# EAGLE board eagle (EAGLE 7.5.0)
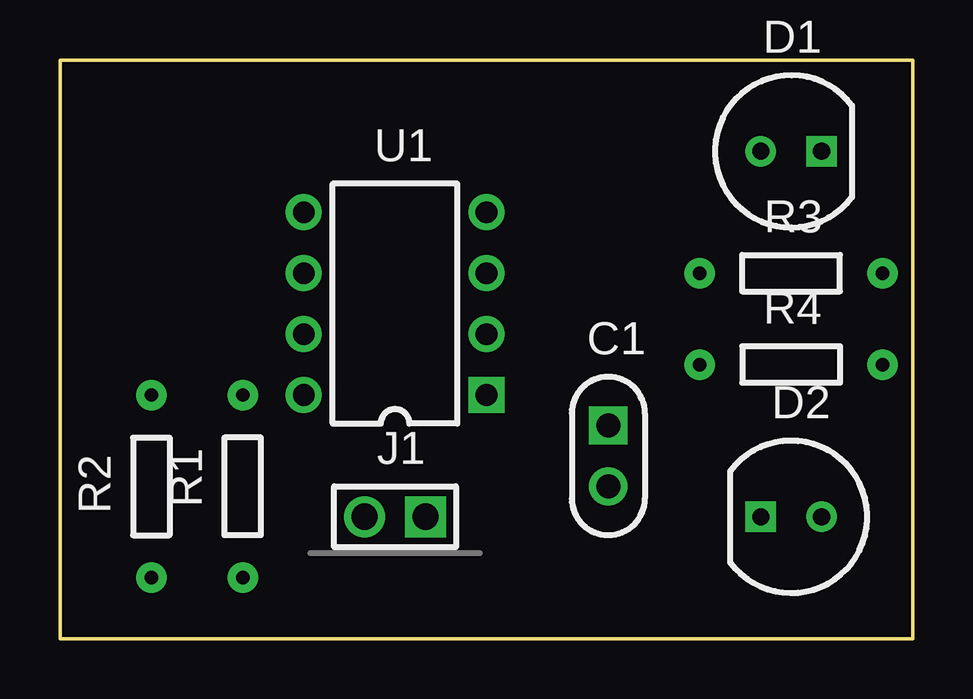
[diagram p0: board, top side]
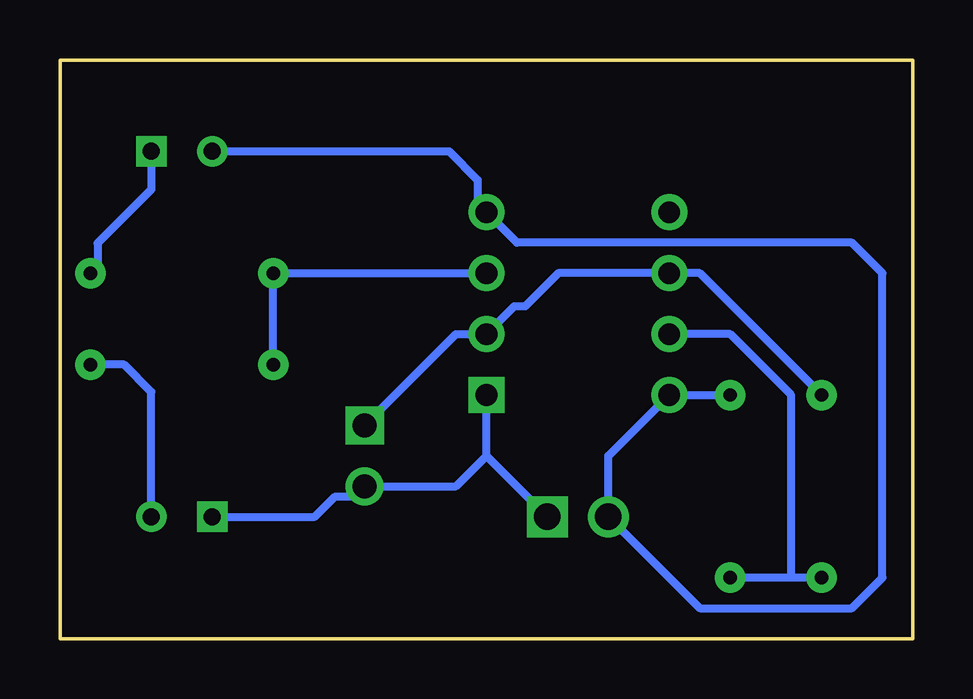
[diagram p1: board, bottom side, seen from below]

Size 35.56 x 24.13 mm. Coordinates in mm from the lower left corner, seen from the top.
Outline: 0,24.13 0,0 35.56,0 35.56,24.13 0,24.13
Copper layers (1*16): Top 0.035mm / dielectric 1.5mm / Bottom 0.035mm
Design rules "default *": minimum track width 10mil, minimum drill 0.61mm, track to track 8mil, track to pad 8mil, pad to pad 8mil, via to via 8mil, smd to smd 8mil, copper to edge 40mil, drill to drill 8mil, minimum pad ring 0mil, minimum via ring 8mil, stop-mask expansion 4mil, vias tented up to drill 19mil, thermal gap 10mil
Net classes: 0 Default: width 0.33 mm, clearance 0.33 mm

## Footprints (pad centres in the part's own frame; a part is rotated, then mirrored left to right if it is on the bottom)
CAP-2.54/6.6x3 = drill 1 pad 1.6 square: 1 -1.27,0 | drill 1 pad 1.6: 2 1.27,0
LED100 = drill 0.711 pad 1.27 square: 1 -1.27,0 | drill 0.711 pad 1.27: 2 1.27,0
HDR-1x2T/2.54/5x2 = drill 1.1 pad 1.7 square: 1 -1.27,0 | drill 1.1 pad 1.7: 2 1.27,0
RES-7.62/4x1.5 = drill 0.559 pad 1.27: 1 -3.81,0; 2 3.81,0
RES-7.62/4x1.5_R3 = drill 0.559 pad 1.27: 1 -3.81,0; 2 3.81,0
DIP-8 = drill 0.9 pad 1.5 square: 1 -3.81,3.81 | drill 0.9 pad 1.5: 2 -3.81,1.27; 3 -3.81,-1.27; 4 -3.81,-3.81; 5 3.81,-3.81; 6 3.81,-1.27; 7 3.81,1.27; 8 3.81,3.81

## Placement (x,y rotation side)
C1  CAP  [CAP-2.54/6.6x3]  22.86,7.62 270 top
D1  LED  [LED100]  30.48,20.32 180 top
D2  LED  [LED100]  30.48,5.08 0 top
J1  644456-2  [HDR-1x2T/2.54/5x2]  13.97,5.08 180 top
R1  RES  [RES-7.62/4x1.5]  7.62,6.35 90 top
R2  RES  [RES-7.62/4x1.5]  3.81,6.35 270 top
R3  RES  [RES-7.62/4x1.5_R3]  30.48,15.24 0 top
R4  RES  [RES-7.62/4x1.5_R3]  30.48,11.43 180 top
U1  NE555N  [DIP-8]  13.97,13.97 180 top

## Library data of the parts
C1 D1 D2 R1-R4 = common
J1 = common; DATASHEET: http://datasheets.diptrace.com/con_headers/ENG_CD_644456_D2.pdf; MANUFACTURER: TE Connectivity
U1 = common; DATASHEET: http://datasheets.diptrace.com/st_micro/CD00000479.pdf; MANUFACTURER: ST Microelectronics

## Nets
Gnd: C1.2 D2.1 J1.1 U1.1
Net_0: R1.1 R2.2 U1.7
Net_1: D1.2 J1.2 R1.2 U1.4 U1.8
Net_2: C1.1 R2.1 U1.2 U1.6
Net_5: D1.1 R3.2
Net_6: R3.1 R4.2 U1.3
Net_7: D2.2 R4.1

## Tracks (layer width: path | path; a pad name or v marks a point on that pad's centre or on a via)
Gnd
  Bottom 0.33: J1.1 17.78,7.62 | 17.78,7.62 U1.1 | 17.78,7.62 19.05,6.35 C1.2 23.28,5.93 24.09,5.93 24.94,5.08 D2.1
Net_0
  Bottom 0.33: R1.1 R2.2 5.08,2.54 5.08,10.16 7.62,12.7 U1.7
Net_1
  Bottom 0.33: D1.2 19.34,20.32 18.15,19.13 18.15,18.15 U1.4 16.51,16.51 2.54,16.51 1.27,15.24 1.27,2.54 2.54,1.27 8.89,1.27 J1.2 12.7,7.62 U1.8 R1.2
Net_2
  Bottom 0.33: C1.1 19.05,12.7 U1.2 16.63,13.85 16.17,13.85 14.78,15.24 U1.6 8.89,15.24 R2.1
Net_5
  Bottom 0.33: D1.1 31.75,18.73 33.99,16.49 33.99,15.54 R3.2
Net_6
  Bottom 0.33: U1.3 R3.1 R4.2
Net_7
  Bottom 0.33: D2.2 31.75,10.29 32.89,11.43 R4.1